# EAGLE board RESISTORS_A (EAGLE 4.09)

Size 160 x 100 mm. Coordinates in mm from the lower left corner, seen from the top.
Outline: 0,0 160,0 160,100 0,100 0,0
Copper layers used: 

## Footprints (pad centres in the part's own frame; a part is rotated, then mirrored left to right if it is on the bottom)
0204/5 = drill 0.813 octagon: 1 -2.54,0; 2 2.54,0
0204/7 = drill 0.813 octagon: 1 -3.81,0; 2 3.81,0
0207/2V = drill 0.813 octagon: 1 -1.27,0; 2 1.27,0
0207/7 = drill 0.813 octagon: 1 -3.81,0; 2 3.81,0
0207/10 = drill 0.813 octagon: 1 -5.08,0; 2 5.08,0
0207/12 = drill 0.813 octagon: 1 -6.35,0; 2 6.35,0
0207/15 = drill 0.813 octagon: 1 -7.62,0; 2 7.62,0
0309/10 = drill 0.813 octagon: 1 -5.08,0; 2 5.08,0
0309/12 = drill 0.813 octagon: 1 -6.35,0; 2 6.35,0
0309V = drill 0.813 octagon: 1 -1.27,0; 2 1.27,0
0414/15 = drill 1.016 octagon: 1 -7.62,0; 2 7.62,0
0414V = drill 1.016 octagon: 1 -2.54,0; 2 2.54,0
0617/17 = drill 1.016 octagon: 1 -8.89,0; 2 8.89,0
0617/22 = drill 1.016 octagon: 1 -11.43,0; 2 11.43,0
0617V = drill 1.016 octagon: 1 -2.54,0; 2 2.54,0
0922/22 = drill 1.016 octagon: 1 -11.43,0; 2 11.43,0
R1210 = smd 1.6 x 2.7: 1 -1.4,0; 2 1.4,0
R1206 = smd 1.6 x 1.803: 1 -1.422,0; 2 1.422,0
R0805 = smd 1.3 x 1.5: 1 -0.85,0; 2 0.85,0
M0805 = smd 1.3 x 1.6: 1 -0.95,0; 2 0.95,0
R0603 = smd 1 x 1.1: 1 -0.85,0; 2 0.85,0
R0402 = smd 0.7 x 0.9: 1 -0.65,0; 2 0.65,0
RN-5 = drill 0.813 offset: 1 -5.08,0; 2 -2.54,0; 3 0,0; 4 2.54,0; 5 5.08,0
RN-6 = drill 0.813 offset: 1 -6.35,0; 2 -3.81,0; 3 -1.27,0; 4 1.27,0; 5 3.81,0; 6 6.35,0
RN-7 = drill 0.813 offset: 1 -7.62,0; 2 -5.08,0; 3 -2.54,0; 4 0,0; 5 2.54,0; 6 5.08,0; 7 7.62,0
RN-8 = drill 0.813 offset: 1 -8.89,0; 2 -6.35,0; 3 -3.81,0; 4 -1.27,0; 5 1.27,0; 6 3.81,0; 7 6.35,0; 8 8.89,0
RN-9 = drill 0.813 offset: 1 -10.16,0; 2 -7.62,0; 3 -5.08,0; 4 -2.54,0; 5 0,0; 6 2.54,0; 7 5.08,0; 8 7.62,0; 9 10.16,0
RN-10 = drill 0.813 offset: 1 -11.43,0; 2 -8.89,0; 3 -6.35,0; 4 -3.81,0; 5 -1.27,0; 6 1.27,0; 7 3.81,0; 8 6.35,0; 9 8.89,0; 10 11.43,0
RN-11 = drill 0.813 offset: 1 -12.7,0; 2 -10.16,0; 3 -7.62,0; 4 -5.08,0; 5 -2.54,0; 6 0,0; 7 2.54,0; 8 5.08,0; 9 7.62,0; 10 10.16,0; 11 12.7,0
SIL4 = drill 0.813 offset: 1 -3.81,0; 2 -1.27,0; 3 1.27,0; 4 3.81,0
SIL5 = drill 0.813 offset: 1 -5.08,0; 2 -2.54,0; 3 0,0; 4 2.54,0; 5 5.08,0
SIL6 = drill 0.813 offset: 1 -6.35,0; 2 -3.81,0; 3 -1.27,0; 4 1.27,0; 5 3.81,0; 6 6.35,0
SIL7 = drill 0.813 offset: 1 -7.62,0; 2 -5.08,0; 3 -2.54,0; 4 0,0; 5 2.54,0; 6 5.08,0; 7 7.62,0
SIL8 = drill 0.813 offset: 1 -8.89,0; 2 -6.35,0; 3 -3.81,0; 4 -1.27,0; 5 1.27,0; 6 3.81,0; 7 6.35,0; 8 8.89,0
SIL9 = drill 0.813 offset: 1 -10.16,0; 2 -7.62,0; 3 -5.08,0; 4 -2.54,0; 5 0,0; 6 2.54,0; 7 5.08,0; 8 7.62,0; 9 10.16,0
SIL10 = drill 0.813 offset: 1 -11.43,0; 2 -8.89,0; 3 -6.35,0; 4 -3.81,0; 5 -1.27,0; 6 1.27,0; 7 3.81,0; 8 6.35,0; 9 8.89,0; 10 11.43,0
SIL11 = drill 0.813 offset: 1 -12.7,0; 2 -10.16,0; 3 -7.62,0; 4 -5.08,0; 5 -2.54,0; 6 0,0; 7 2.54,0; 8 5.08,0; 9 7.62,0; 10 10.16,0; 11 12.7,0
SIL12 = drill 0.813 offset: 1 -13.97,0; 2 -11.43,0; 3 -8.89,0; 4 -6.35,0; 5 -3.81,0; 6 -1.27,0; 7 1.27,0; 8 3.81,0; 9 6.35,0; 10 8.89,0; 11 11.43,0; 12 13.97,0
SIL13 = drill 0.813 offset: 1 -15.24,0; 2 -12.7,0; 3 -10.16,0; 4 -7.62,0; 5 -5.08,0; 6 -2.54,0; 7 0,0; 8 2.54,0; 9 5.08,0; 10 7.62,0; 11 10.16,0; 12 12.7,0; 13 15.24,0
SIL14 = drill 0.813 offset: 1 -16.51,0; 2 -13.97,0; 3 -11.43,0; 4 -8.89,0; 5 -6.35,0; 6 -3.81,0; 7 -1.27,0; 8 1.27,0; 9 3.81,0; 10 6.35,0; 11 8.89,0; 12 11.43,0; 13 13.97,0; 14 16.51,0
S64Y = drill 0.813 long: A 2.54,1.27; E -2.54,1.27; S 0,-1.27
B25X = drill 0.813 offset: A 2.54,-1.905; E -2.54,-1.905; S 0,0.635
B25V = drill 0.813 offset: A 2.54,0.635; E -2.54,0.635; S 0,0.635
RTRIM64W = drill 0.61 round: 1 1.27,-2.54; 2 1.27,0; 3 1.27,2.54
RTRIM64Y = drill 0.61 round: 1 0,-2.54; 2 -2.54,0; 3 0,2.54
RTRIM3202 = smd 0.9 x 1.3: 1 -0.95,-1.75; 3 0.95,-1.75 | smd 1.6 x 1.4: 2 0,1.6

## Placement (x,y rotation side)
E$1  0204/5  [0204/5]  9.52,90.64 0 top
E$2  0204/7  [0204/7]  20.95,90.64 0 top
E$3  0207/2V  [0207/2V]  31.11,90.64 0 top
E$4  0207/7  [0207/7]  41.27,90.64 0 top
E$5  0207/10  [0207/10]  56.51,90.64 0 top
E$6  0207/12  [0207/12]  74.29,90.64 0 top
E$7  0207/12  [0207/15]  92.07,90.64 0 top
E$8  0309/10  [0309/10]  109.85,90.64 0 top
E$9  0309/12  [0309/12]  125.09,90.64 0 top
E$10  0309V  [0309V]  139.06,90.64 0 top
E$11  0414/15  [0414/15]  14.6,79.21 0 top
E$12  0414V  [0414V]  32.38,79.21 0 top
E$13  0617/17  [0617/17]  50.16,79.21 0 top
E$14  0617/22  [0617/22]  75.56,79.21 0 top
E$15  0617V  [0617V]  95.88,79.21 0 top
E$16  0922/22  [0922/22]  116.2,79.21 0 top
E$17  R1210  [R1210]  10.79,66.51 0 top
E$18  R1206  [R1206]  19.68,66.51 0 top
E$19  R0805  [R0805]  28.57,66.51 0 top
E$20  M0805  [M0805]  37.46,66.51 0 top
E$21  R0603  [R0603]  46.35,66.51 0 top
E$22  R0402  [R0402]  53.97,66.51 0 top
E$23  RN-5  [RN-5]  8.25,53.81 0 top
E$24  RN-6  [RN-6]  24.76,53.81 0 top
E$25  RN-7  [RN-7]  43.81,53.81 0 top
E$26  RN-8  [RN-8]  65.4,53.81 0 top
E$27  RN-9  [RN-9]  89.53,53.81 0 top
E$28  RN-10  [RN-10]  116.2,53.81 0 top
E$29  RN-11  [RN-11]  144.14,53.81 0 top
E$30  SIL4  [SIL4]  12.06,39.84 0 top
E$31  SIL5  [SIL5]  26.03,39.84 0 top
E$32  SIL6  [SIL6]  43.81,39.84 0 top
E$33  SIL7  [SIL7]  62.86,39.84 0 top
E$34  SIL8  [SIL8]  84.45,39.84 0 top
E$35  SIL9  [SIL9]  109.85,39.84 0 top
E$36  SIL10  [SIL10]  137.79,39.84 0 top
E$37  SIL11  [SIL11]  20.95,25.87 0 top
E$38  SIL12  [SIL12]  53.97,25.87 0 top
E$39  SIL13  [SIL13]  89.53,25.87 0 top
E$40  SIL14  [SIL14]  127.63,25.87 0 top
E$41  S64Y  [S64Y]  12.06,10.63 0 top
E$42  B25X  [B25X]  48.89,10.63 180 top
E$43  B25V  [B25V]  60.32,10.63 180 top
E$44  RTRIM64W  [RTRIM64W]  24.76,10.63 90 top
E$45  RTRIM64Y  [RTRIM64Y]  37.46,10.63 90 top
E$46  RTRIM3202  [RTRIM3202]  70.48,10.63 270 top

## Library data of the parts
E$1-E$22 E$44-E$46 = rcl
E$23-E$29 = resistor-net
E$30-E$40 = resistor-sil
E$41-E$43 = pot

## Text on the board
Top: DISCRETE RESISTORS | SMD RESISTORS | NETWORK RESISTORS | TRIMMER RESISTORS